# EAGLE board arduino_fio (EAGLE 5.00)
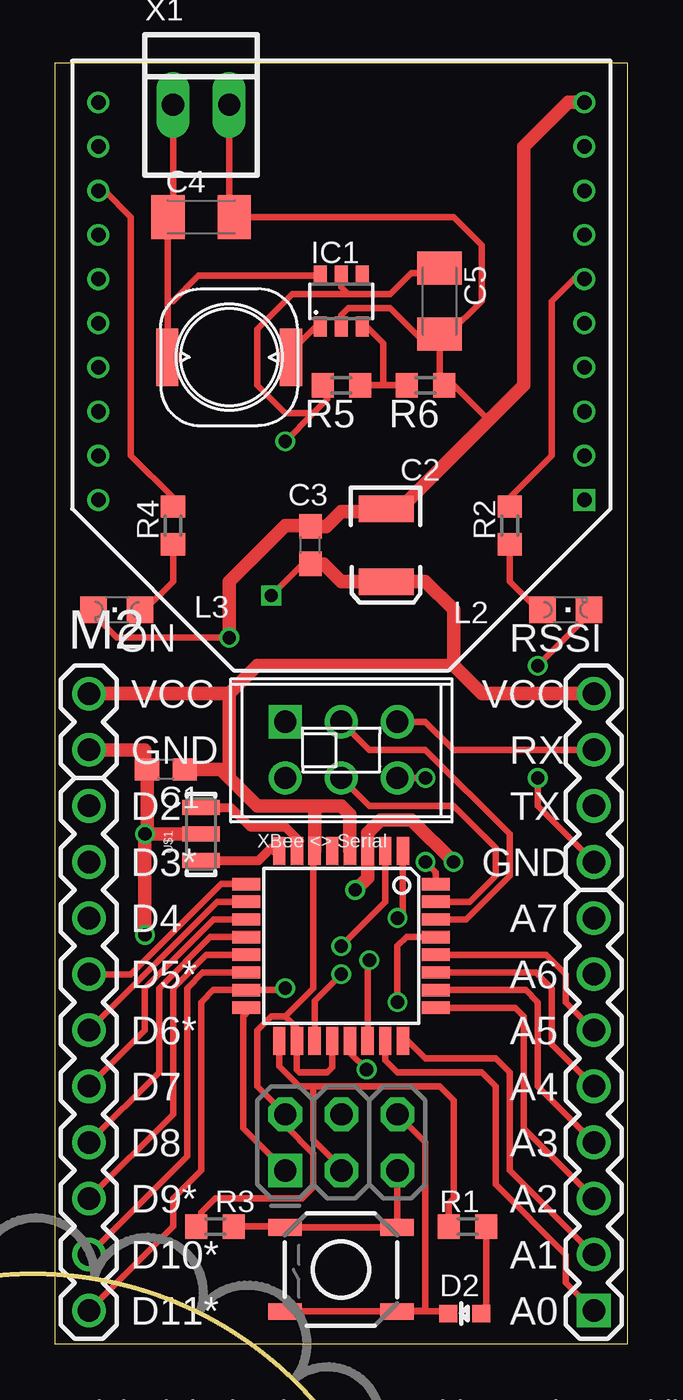
[diagram p0: board, top side]
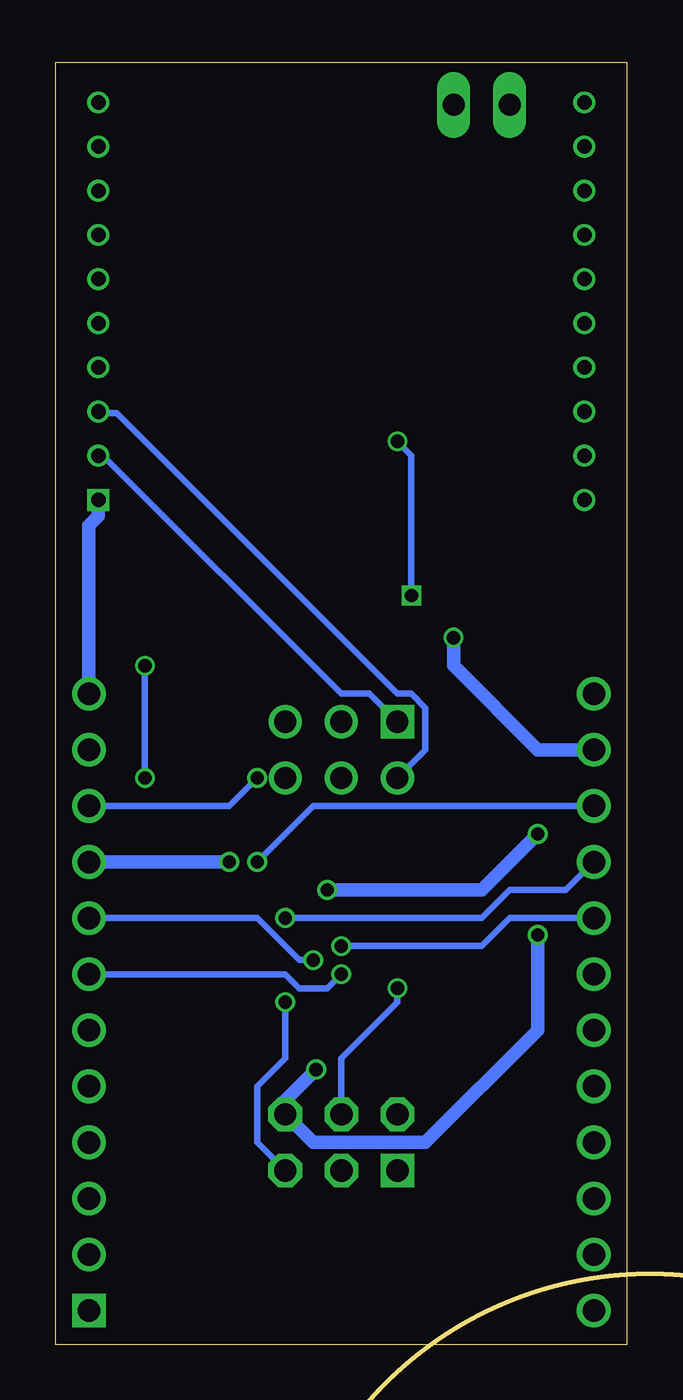
[diagram p1: board, bottom side, seen from below]

Size 25.91 x 58.04 mm. Coordinates in mm from the lower left corner, seen from the top.
Outline: 0,0 0,58.04 25.91,58.04 25.91,0 0,0
Copper layers (1*16): Top 0.035mm / dielectric 1.5mm / Bottom 0.035mm
Design rules "p_ban_2layer *": minimum track width 5mil, minimum drill 0.3mm, track to track 5mil, track to pad 5mil, pad to pad 5mil, via to via 5mil, smd to smd 5mil, copper to edge 0.5mm, drill to drill 0.3mm, minimum pad ring 0.15mm, minimum via ring 0.15mm, stop-mask expansion 4mil, vias tented up to drill 0.35mm, thermal gap 10mil
Net classes: 0 Default: width 0.203 mm; 1 VCC: width 0.381 mm; 2 LEDPower: width 0.203 mm; 3 ButtonSignal: width 0.203 mm
Milling: area -17.9,-30.6 to 15.9,3.2

## Footprints (pad centres in the part's own frame; a part is rotated, then mirrored left to right if it is on the bottom)
0603 = smd 1.1 x 1: 1 -0.85,0; 2 0.85,0
EIA3528 = smd 1.2 x 2.5: A 1.65,0; C -1.65,0
C1206K = smd 1.5 x 2: 1 -1.5,0; 2 1.5,0
LED-0603 = smd 0.8 x 0.8: A 0,-0.75; C 0,0.75
SOT23-6 = smd 0.6 x 0.9: 1 -0.95,-1.15; 2 0,-1.15; 3 0.95,-1.15; 4 0.95,1.15; 5 0,1.15; 6 -0.95,1.15
1X04 = drill 1.016 round: 1 0,0; 2 2.54,0; 3 5.08,0; 4 7.62,0
1X02 = drill 1.016 round: 1 0,0; 2 2.54,0
2X3-NS = drill 1.016 square: 1 -2.54,-1.27 | drill 1.016 octagon: 2 -2.54,1.27; 3 0,-1.27; 4 0,1.27; 5 2.54,-1.27; 6 2.54,1.27
1X08 = drill 1.016 square: 1 0,0 | drill 1.016 round: 2 2.54,0; 3 5.08,0; 4 7.62,0; 5 10.16,0; 6 12.7,0; 7 15.24,0; 8 17.78,0
1X10 = drill 1.016 round: 1 0,0; 2 2.54,0; 3 5.08,0; 4 7.62,0; 5 10.16,0; 6 12.7,0; 7 15.24,0; 8 17.78,0; 9 20.32,0; 10 22.86,0
D63LCB = smd 1 x 2.6: P$1 -2.8,0; P$2 2.8,0
CHIPLED_0805 = smd 1.2 x 1.2: A 0,-1.05; C 0,1.05
XBEE = drill 0.66 square: 1 -11,9 | drill 0.66 round: 2 -11,7; 3 -11,5; 4 -11,3; 5 -11,1; 6 -11,-1; 7 -11,-3; 8 -11,-5; 9 -11,-7; 10 -11,-9; 11 11,-9; 12 11,-7; 13 11,-5; 14 11,-3; 15 11,-1; 16 11,1; 17 11,3; 18 11,5; 19 11,7; 20 11,9
R0603 = smd 1 x 1.1: 1 -0.85,0; 2 0.85,0
TACTILE_SWITCH_SMD = smd 1.524 x 0.762: 1 -2.54,1.905; 2 2.54,1.905; 3 -2.54,-1.905; 4 2.54,-1.905
SS-22SDP2 = drill 1 square: 1 -2.54,1.27 | drill 1 round: 2 0,1.27; 3 2.54,1.27; 4 -2.54,-1.27; 5 0,-1.27; 6 2.54,-1.27
TQFP32-08 = smd 1.27 x 0.559: 1 -4.293,2.8; 2 -4.293,2; 3 -4.293,1.2; 4 -4.293,0.4; 5 -4.293,-0.4; 6 -4.293,-1.2; 7 -4.293,-2; 8 -4.293,-2.8; 17 4.293,-2.8; 18 4.293,-2; 19 4.293,-1.2; 20 4.293,-0.4; 21 4.293,0.4; 22 4.293,1.2; 23 4.293,2; 24 4.293,2.8 | smd 0.559 x 1.27: 9 -2.8,-4.293; 10 -2,-4.293; 11 -1.2,-4.293; 12 -0.4,-4.293; 13 0.4,-4.293; 14 1.2,-4.293; 15 2,-4.293; 16 2.8,-4.293; 25 2.8,4.293; 26 2,4.293; 27 1.2,4.293; 28 0.4,4.293; 29 -0.4,4.293; 30 -1.2,4.293; 31 -2,4.293; 32 -2.8,4.293
RESONATOR-SMD = smd 0.7 x 1.7: 1 -1.2,0; 2 0,0; 3 1.2,0
22-23-2021 = drill 1 long: 1 -1.27,0; 2 1.27,0

## Placement (x,y rotation side)
C1  0.1uF  [0603]  5.01,26.04 180 top
C2  47uF  [EIA3528]  14.99,36.2 270 top
C3  1.0uF  [0603]  11.56,36.2 90 top
C4  10µ  [C1206K]  6.6,51.05 0 top
C5  10µ  [C1206K]  17.4,47.24 270 top
D2  Status  [LED-0603]  18.54,1.4 90 top
IC1  AS1322  [SOT23-6]  12.95,47.24 0 top
JP1  Serial  [1X04]  24.38,21.84 90 top
JP2  [1X02]  1.52,29.46 270 top
JP3  SPI_PROG  [2X3-NS]  12.95,9.14 0 top
JP4  [1X08]  24.38,1.52 90 top
JP5  [1X10]  1.52,24.38 270 top
L1  10µ  [D63LCB]  7.87,44.7 0 top
L2  [CHIPLED_0805]  23.11,33.27 270 top
L3  [CHIPLED_0805]  2.79,33.27 90 top
M2  XBEE  [XBEE]  12.95,47.24 180 top
R1  1k  [R0603]  18.67,5.33 0 top
R2  1k  [R0603]  20.57,37.08 90 top
R3  1k  [R0603]  7.24,5.33 180 top
R4  1k  [R0603]  5.33,37.08 90 top
R5  [R0603]  12.95,43.43 180 top
R6  [R0603]  16.76,43.43 180 top
S1  [TACTILE_SWITCH_SMD]  12.94,3.39 180 top
SW1  SS-22SDP2  [SS-22SDP2]  12.95,26.92 0 top
U1  ATMEGA168V  [TQFP32-08]  12.94,18.04 270 top
U$1  CSTCE8M00G55Z  [RESONATOR-SMD]  6.6,23.11 90 top
X1  22-23-2021  [22-23-2021]  6.6,56.13 0 top

## Library data of the parts
C1-C3 D2 JP1-JP5 S1 U1 U$1 = SparkFun
C4 C5 R1-R6 = rcl
IC1 = austriamicrosystems_as1322
L1 = inductor_toko
L2 L3 = led
M2 = digi_xbee
SW1 = nikkai_ss
X1 = con-molex

## Nets
A0: JP4.1 U1.23
A1: JP4.2 U1.24
A2: JP4.3 U1.25
A3: JP4.4 U1.26
A4: JP4.5 U1.27
A5: JP4.6 U1.28
A6: JP4.7 U1.19
A7: JP4.8 U1.22
D2: JP5.1 U1.32
D3: JP5.2 U1.1
D4: JP5.3 U1.2
D5: JP5.4 U1.9
D6: JP5.5 U1.10
D7: JP5.6 U1.11
D8: JP5.7 U1.12
D9: JP5.8 U1.13
D10: JP5.9 U1.14
GND [VCC]: C1.2 C2.C C3.2 C4.2 C5.2 D2.C IC1.2 JP1.1 JP2.2 JP3.6 L2.C L3.C M2.10 R6.1 S1.1 S1.2 U1.3 U1.21 U$1.2 X1.2
MISO: JP3.1 U1.16
MOSI: JP3.4 JP5.10 U1.15
N$1: M2.13 R4.2
N$2: D2.A R1.2
N$3: L2.A R2.1
N$4: M2.6 R2.2
N$5: M2.2 SW1.1
N$6: L3.A R4.1
N$7: M2.3 SW1.4
N$8: JP1.2 SW1.6
N$9: JP1.3 SW1.3
N$10: U1.7 U$1.3
N$11: IC1.3 R5.1 R6.2
N$12: U1.8 U$1.1
N$13: C4.1 IC1.6 L1.P$1 X1.1
N$14: IC1.1 L1.P$2
RST: JP3.5 R3.1 S1.3 S1.4 U1.29
RX: SW1.2 U1.30
SCK: JP3.3 R1.1 U1.17
TX: SW1.5 U1.31
VCC [VCC]: C1.1 C2.A C3.1 C5.1 IC1.5 JP1.4 JP2.1 JP3.2 M2.1 R3.2 R5.2 U1.4 U1.6 U1.18 U1.20

## Tracks (layer width: path | path; a pad name or v marks a point on that pad's centre or on a via)
A0
  Top 0.305: U1.23 14.94,12.87 15.49,12.32 19.3,12.32 19.94,11.68 19.94,7.24 23.11,4.06 23.11,2.79 JP4.1
A1
  Top 0.305: U1.24 15.97,13.75 16.76,12.95 19.94,12.95 20.57,12.32 20.57,7.87 JP4.2
A2
  Top 0.305: U1.25 20.82,15.24 21.21,14.86 21.21,9.78 JP4.3
A3
  Top 0.305: U1.26 21.29,16.04 21.84,15.49 21.84,11.68 JP4.4
A4
  Top 0.305: U1.27 21.76,16.84 22.48,16.13 22.48,13.59 JP4.5
A5
  Top 0.305: U1.28 22.23,17.64 23.11,16.76 23.11,15.49 JP4.6
A6  (via drill 0.6)
  Top 0.305: U1.19 11.74,15.55 v12.95,16.76
  Bottom 0.305: v12.95,16.76 13.59,16.13 14.86,16.13 15.49,16.76 JP4.7
A7  (via drill 0.6)
  Top 0.305: U1.22 14.14,17.32 v14.22,17.4
  Bottom 0.305: JP4.8 16.76,19.3 14.86,17.4 v14.22,17.4
D2  (via drill 0.6)
  Top 0.305: U1.32 17.24,21.37 v16.76,21.84
  Bottom 0.305: v16.76,21.84 14.22,24.38 JP5.1
D3  (via drill 0.6)
  Top 0.305: U1.1 15.74,19.55 v15.49,19.3
  Bottom 0.305: JP5.2 2.79,20.57 5.33,20.57 6.6,19.3 v15.49,19.3
D4  (via drill 0.6)
  Top 0.305: U1.2 14.94,20.02 v12.95,18.03
  Bottom 0.305: v12.95,18.03 6.6,18.03 5.33,19.3 JP5.3
D5
  Top 0.305: U1.9 7.51,20.84 3.43,16.76 JP5.4
D6
  Top 0.305: U1.10 7.34,20.04 JP5.5
D7
  Top 0.305: U1.11 7.18,19.24 4.06,16.13 4.06,14.22 JP5.6
D8
  Top 0.305: U1.12 7.01,18.44 4.7,16.13 4.7,12.32 JP5.7
D9
  Top 0.305: U1.13 6.85,17.64 5.33,16.13 5.33,10.41 JP5.8
D10
  Top 0.305: U1.14 6.68,16.84 5.97,16.13 5.97,8.51 JP5.9
GND  (via drill 0.6)
  Top 0.305: U1.21 13.34,13.2 v14.1,12.45 | 1.52,33.27 L3.C 1.74,33.05 2.79,32 v7.87,32 | 14.14,23.16 U1.3 | 11.68,37.08 11.64,37.05 | L2.C 24.16,33.05 v21.84,30.73 | v21.84,25.65 21.84,24.38 JP1.1 | 15.48,1.51 15.49,1.52 16.76,1.52 16.76,9.14 JP3.6 | 15.48,1.51 S1.1 17.99,1.49 | S1.2 15.46,1.49 15.48,1.51 | 17.99,1.49 17.91,1.4 D2.C | 17.99,1.49 18.03,1.52 | C2.C | 14.86,37.72 15.49,37.72 | IC1.2 12.95,46.61 13.27,46.93 15.18,46.93 16.45,45.66 17.72,45.66 17.8,45.74 | 17.8,45.74 C5.2 17.4,43.43 R6.1 18.03,43.43 19.62,41.85 | X1.2 7.87,51.05 C4.2 18.03,51.05 19.3,49.78 19.3,47.24 17.8,45.74 | 23.75,56.24 23.75,56.13
  Top 0.61: JP2.2 4.06,26.92 4.06,26.29 4.16,26.19 C1.2 4.16,23.21 v4.06,23.11 | v18.03,21.84 16.13,23.75 14.73,23.75 14.14,23.16 14.14,21.13 v13.59,20.57 | C2.C 14.86,37.72 12.95,37.72 12.28,37.05 C3.2 11.64,37.05 | 11.68,37.08 10.41,37.08 7.87,34.54 v7.87,32 | v4.06,18.54 v4.06,23.11 | 15.49,37.72 19.62,41.85 21.21,43.43 21.21,54.23 23.22,56.24 23.75,56.24 M2.10 | v4.06,23.11 U$1.2
  Bottom 0.305: v21.84,25.65 v21.84,30.73
  Bottom 0.61: v14.1,12.45 15.49,11.05 JP3.6 14.22,9.14 9.14,9.14 4.06,14.22 v4.06,18.54 | v18.03,21.84 JP1.1 | v13.59,20.57 6.6,20.57 v4.06,23.11 | JP2.2 4.06,26.92 7.87,30.73 v7.87,32
MISO
  Top 0.305: JP3.1 8.51,9.78 8.51,14.86 8.65,15 U1.16
MOSI  (via drill 0.6)
  Top 0.305: v10.41,16.13 10.33,16.04 U1.15 7.15,16.04 6.6,15.49 6.6,7.87 5.33,6.6 5.33,5.33 JP5.10
  Bottom 0.305: v10.41,16.13 10.41,15.49 12.95,12.95 JP3.4
N$1
  Top 0.305: 5.33,37.72 R4.2 5.33,38.35 3.43,40.26 3.43,51.05 2.24,52.24 2.16,52.24 | 2.16,52.24 M2.13 | 2.16,52.24 2.16,52.32
N$2
  Top 0.305: D2.A 19.29,1.51 19.52,1.74 R1.2
N$3
  Top 0.305: L2.A 21.84,33.27 20.57,34.54 R2.1
N$4
  Top 0.305: R2.2 20.57,38.35 22.48,40.26 22.48,47.24 23.48,48.24 23.75,48.24 | 23.75,48.24 M2.6 | 23.75,48.24 23.75,48.51
N$5
  Bottom 0.305: 23.75,40.26 23.76,40.24 | 23.75,40.26 12.95,29.46 11.68,29.46 SW1.1 | 23.76,40.24 M2.2 | 23.76,40.24 23.75,40.24 23.75,40.26
N$6
  Top 0.305: L3.A 4.06,33.27 5.33,34.54 R4.1
N$7
  Bottom 0.305: 23.75,42.16 23.83,42.24 | 23.75,42.16 23.11,42.16 10.41,29.46 9.78,29.46 9.14,28.83 9.14,26.92 SW1.4 | 23.83,42.24 M2.3 | 23.83,42.24 23.75,42.24 23.75,42.16
N$8  (via drill 0.6)
  Top 0.305: SW1.6 v16.76,25.65
  Bottom 0.305: v16.76,25.65 18.03,24.38 JP1.2
N$9
  Top 0.305: SW1.3 16.76,28.19 18.03,26.92 JP1.3
N$10
  Top 0.406: U$1.3 7.94,24.31 8.83,23.43 10.41,23.43 11.05,22.8 10.94,22.69 U1.7
N$11
  Top 0.305: R5.1 14.86,43.43 | 14.86,43.43 R6.2 | IC1.3 14.1,46.09 14.86,45.34 14.86,43.43
N$12
  Top 0.406: U1.8 9.92,22.34 9.78,22.48 9.21,21.91 U$1.1
N$13
  Top 0.305: X1.1 5.33,51.05 C4.1 5.1,47.24 | L1.P$1 5.33,44.7 5.1,44.93 5.1,47.24 | 5.1,47.24 5.33,47.24 6.48,48.39 IC1.6
N$14
  Top 0.305: IC1.1 11.8,46.09 10.67,44.96 L1.P$2
RST  (via drill 0.6)
  Top 0.305: U1.29 15.9,18.44 15.49,18.03 v15.49,15.49 | R3.1 10.41,5.33 10.4,5.32 S1.4 15.46,5.29 15.48,5.32 | 15.48,5.32 15.49,5.33 | 15.48,5.32 S1.3 15.48,7.86 JP3.5
  Bottom 0.305: v15.49,15.49 15.49,12.95 16.76,11.68 16.76,9.14 JP3.5
RX
  Top 0.305: U1.30 18.61,19.24 20.57,21.21 20.57,23.11 16.76,26.92 14.22,26.92 SW1.2
SCK
  Top 0.305: 11.68,11.68 17.4,11.68 18.03,11.05 18.03,6.6 17.82,6.39 R1.1 | 11.68,11.68 11.68,9.27 12.95,8 JP3.3 | 11.68,11.68 11.05,11.68 10.14,12.59 U1.17
TX
  Top 0.305: U1.31 18.77,20.04 19.94,21.21 19.94,22.48 18.03,24.38 14.22,24.38 SW1.5
VCC  (via drill 0.6)
  Top 0.305: 6.39,5.12 R3.2 6.6,5.33 6.6,5.97 7.24,6.6 11.18,6.6 11.68,7.11 11.68,8.64 10.41,9.91 JP3.2 9.14,11.68 9.14,14.22 9.78,14.86 10.41,14.86 | 10.41,14.86 10.94,14.33 U1.18 10.94,12.42 11.05,12.32 12.32,12.32 12.54,12.54 U1.20 | 11.74,24.32 11.68,24.38 | 10.41,14.86 11.68,16.13 11.68,22.48 11.74,22.42 U1.6 | 14.86,34.55 14.86,34.54 | IC1.5 12.95,47.88 13.27,47.56 | 13.27,47.56 15.18,47.56 16.13,48.51 17.4,48.51 C5.1 | 12.15,35.34 11.21,35.34 v9.78,33.91 | v10.41,40.89 11.68,42.16 | 11.68,42.16 12.32,42.8 12.32,43.43 R5.2 | 13.27,47.56 10.73,47.56 9.14,45.97 9.14,43.43 10.41,42.16 11.68,42.16
  Top 0.61: 7.87,29.46 JP2.1 | 7.87,29.46 9.14,30.73 18.03,30.73 | 18.03,30.73 19.3,29.46 JP1.4 | 7.87,25.65 7.87,29.46 | U1.6 11.74,24.32 | U1.4 13.34,23.99 12.95,24.38 11.68,24.38 9.14,24.38 7.87,25.65 | C3.1 12.15,35.34 12.95,34.54 14.86,34.54 | 14.86,34.55 C2.A 16.76,34.55 18.03,33.27 18.03,30.73 | C1.1 7.49,26.04 7.87,25.65
  Bottom 0.305: v9.78,33.91 9.78,40.26 v10.41,40.89 | 23.95,38.15 23.86,38.24
  Bottom 0.61: JP1.4 24.38,37.08 23.95,37.51 23.95,38.15 | 23.75,38.35 23.86,38.24 M2.1

## Text on the board
tPlace: ON | RSSI | VCC | VCC | GND | RX | D2 | TX | XBee <> Serial | D3* | GND | D4 | A7 | D5* | A6 | D6* | A5 | D7 | A4 | D8 | A3 | D9* | A2 | D10* | A1 | D11* | A0 | Original design by: L. Buechley and N. Seidle | Released under the Creative Commons Attribution Share-Alike 3.0 License | http://creativecommons.org/licenses/by-sa/3.0